# Altium PCB PCB1 VER 1.0 .PcbDoc
Units mm, origin at the board's own origin, x right, y up, seen from the top; angles counter-clockwise.
Board outline 352.04 x 230.5 mm, 4 copper layers (Top Layer, Internal Plane 1, Internal Plane 2, Bottom Layer); 40 components, 38 nets, 156 pads, 0 vias.
Unrouted connection lines stored in the file: 1.
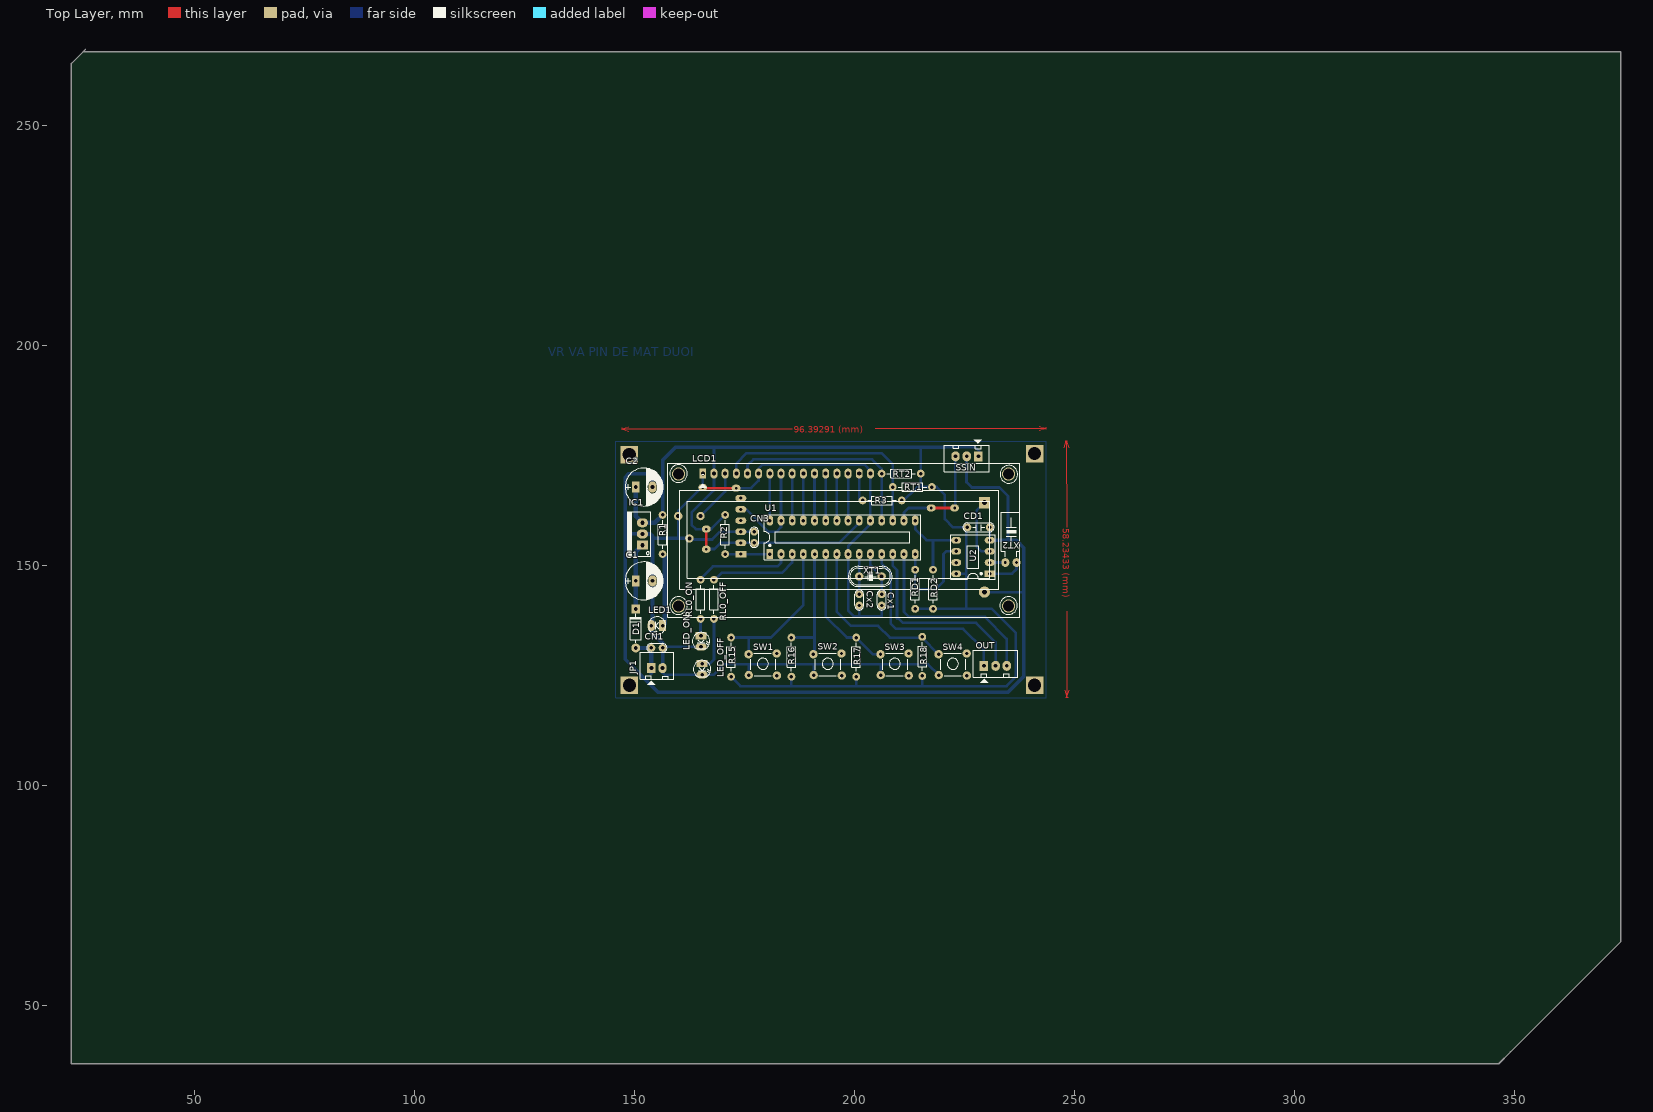
[diagram p0: Top Layer view]
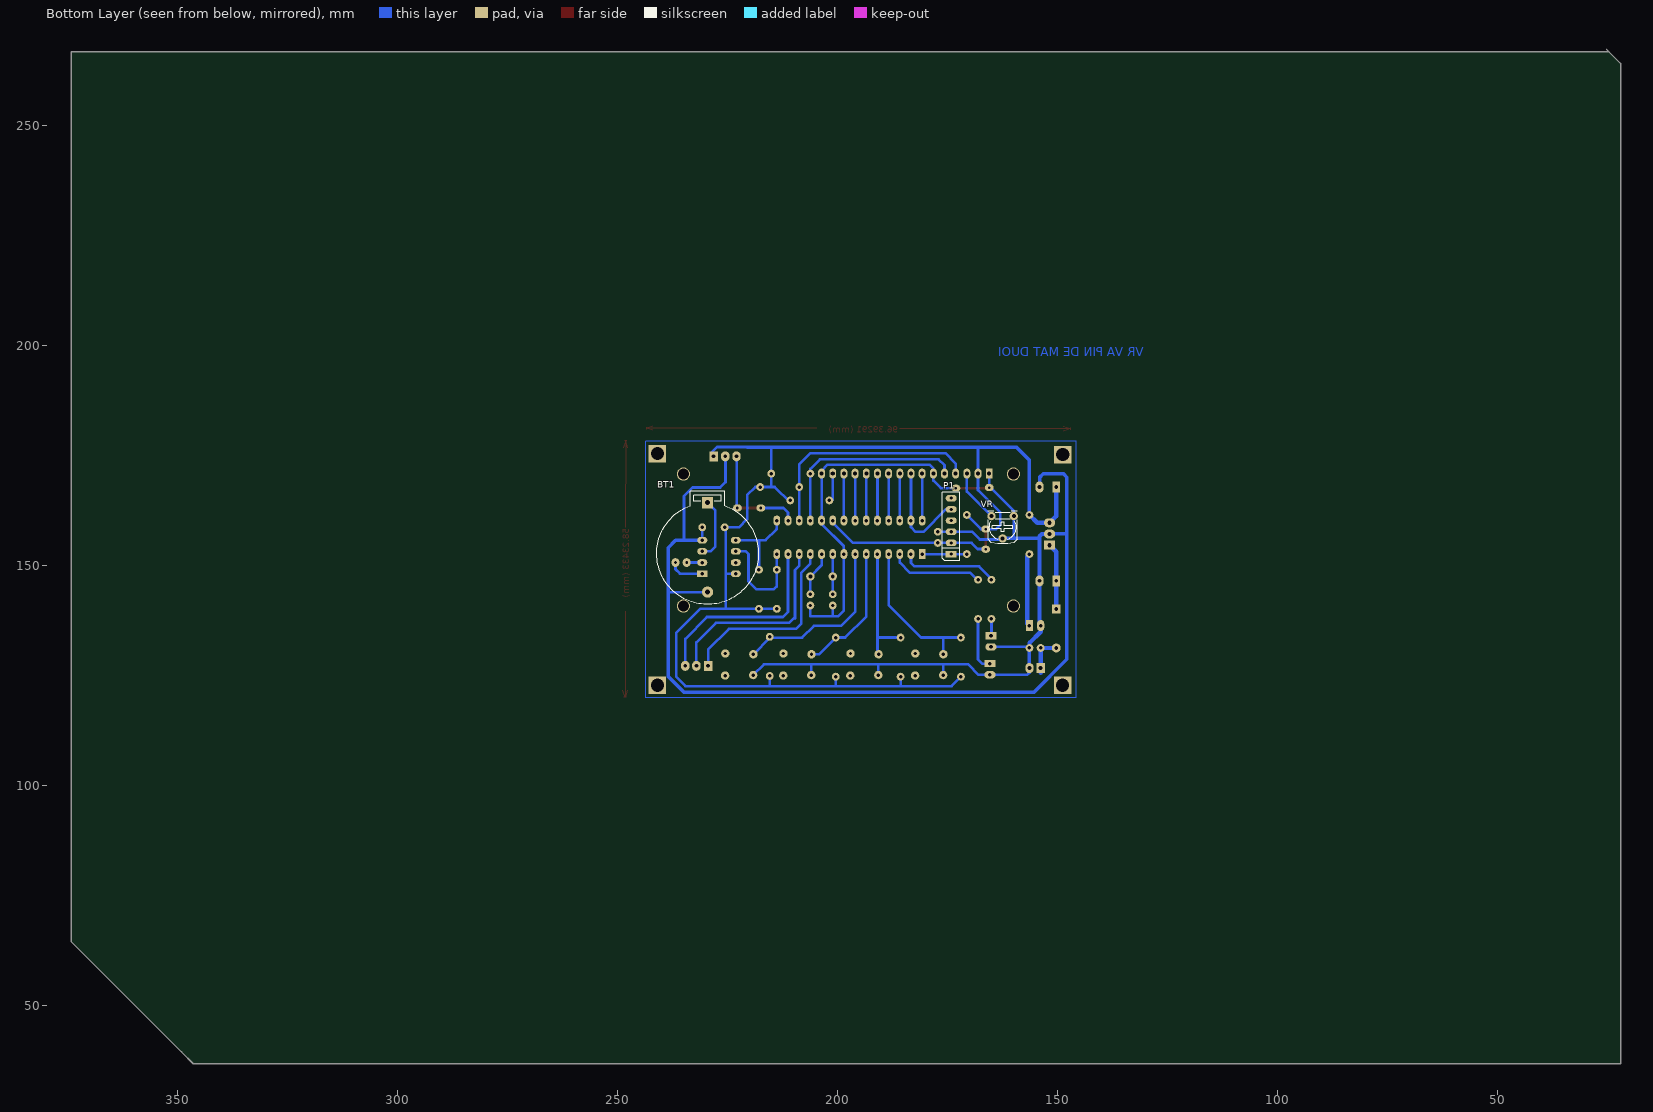
[diagram p1: Bottom Layer view, seen from below]
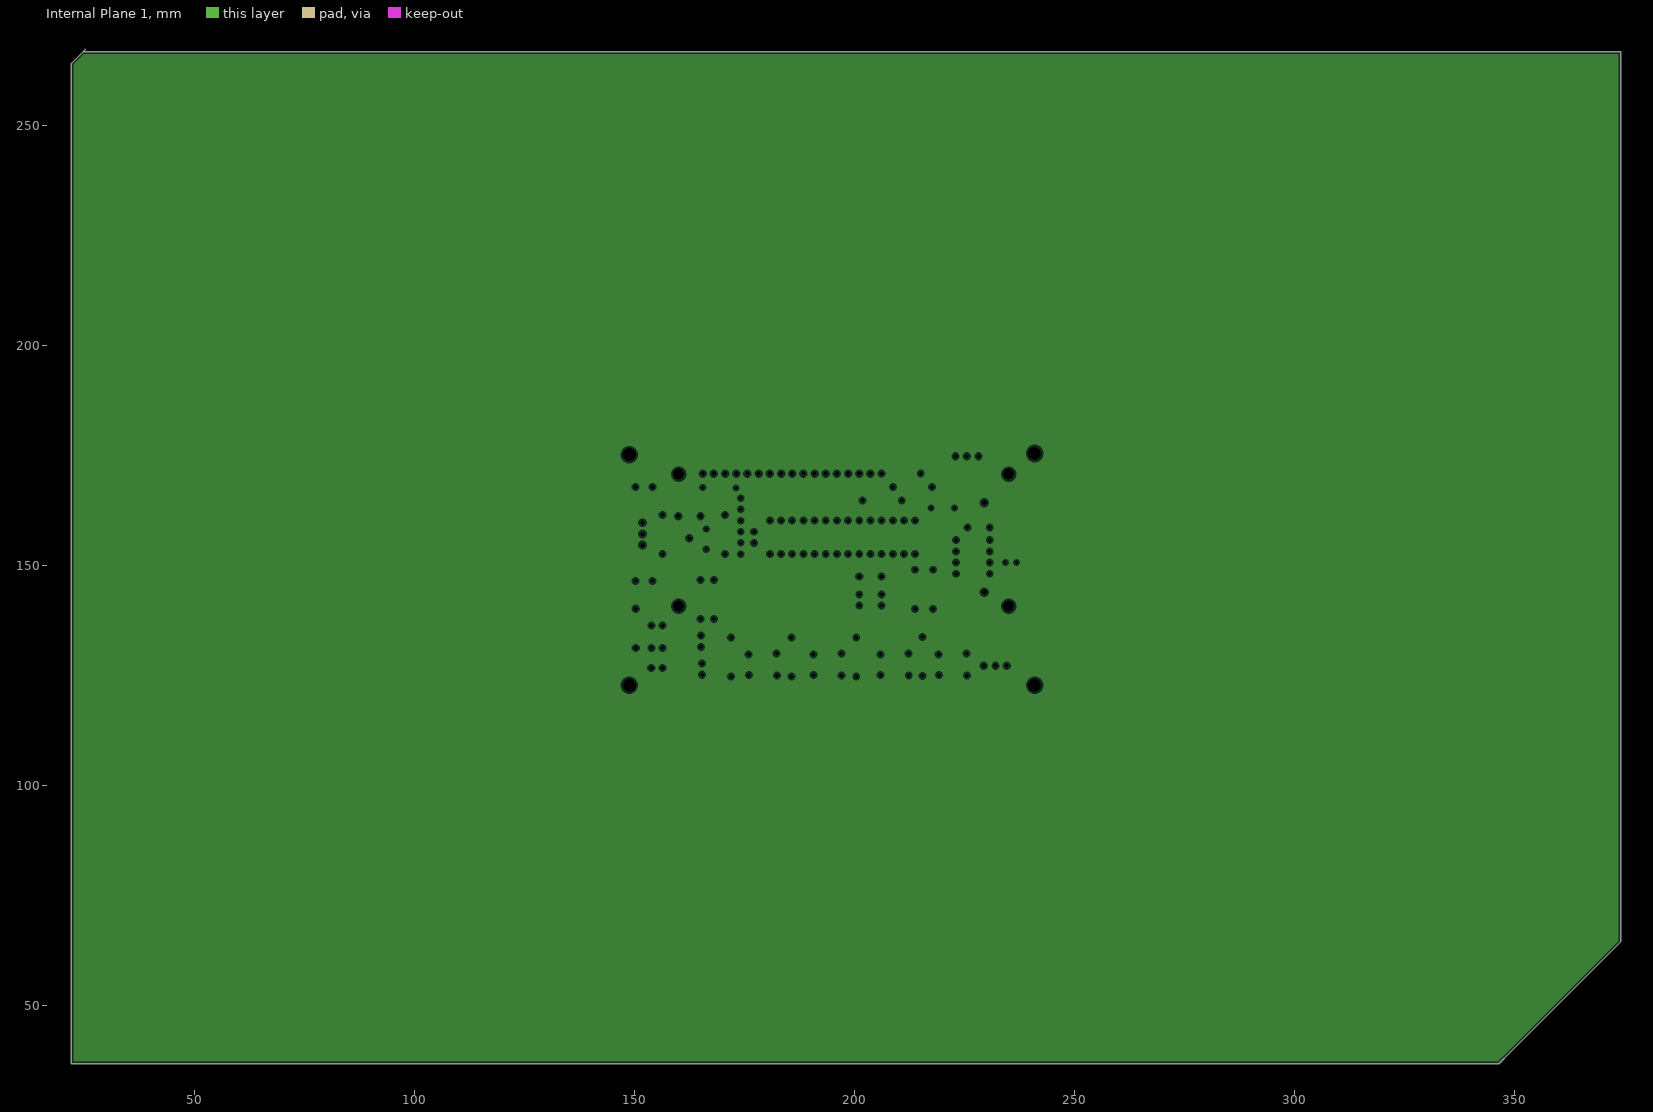
[diagram p2: Internal Plane 1, clearances drawn from the general rule]
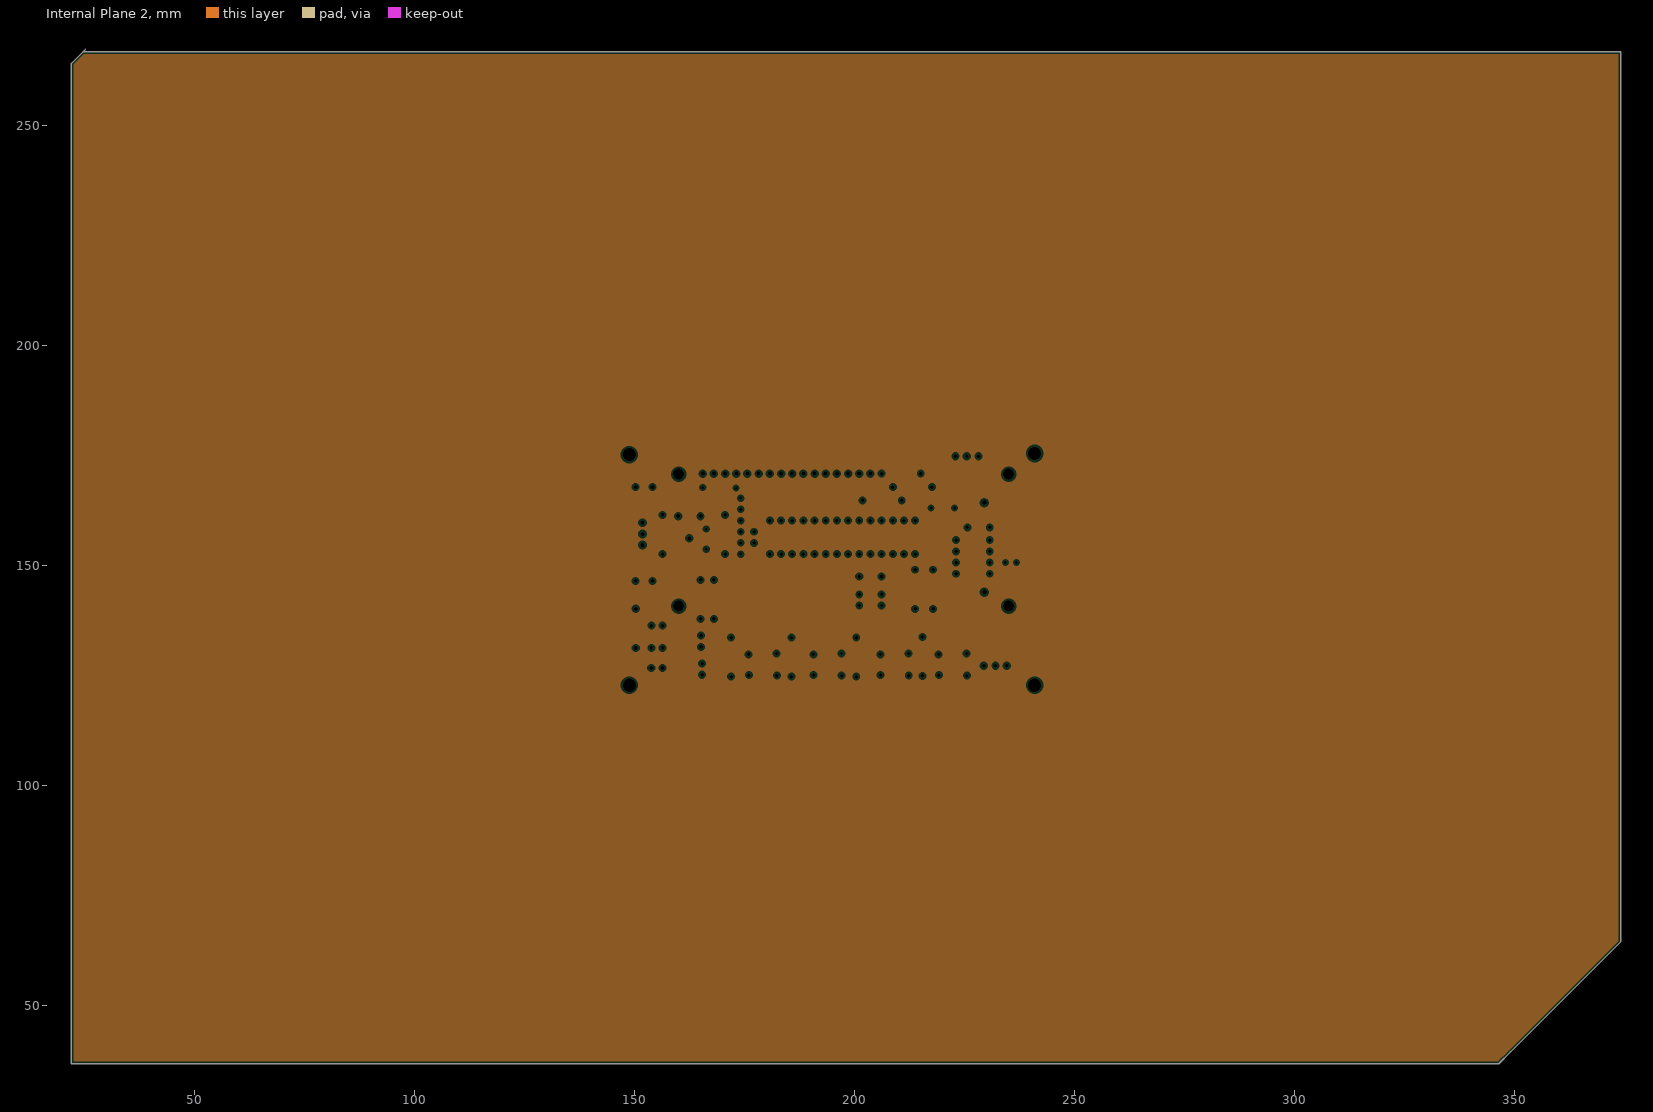
[diagram p3: Internal Plane 2, clearances drawn from the general rule]
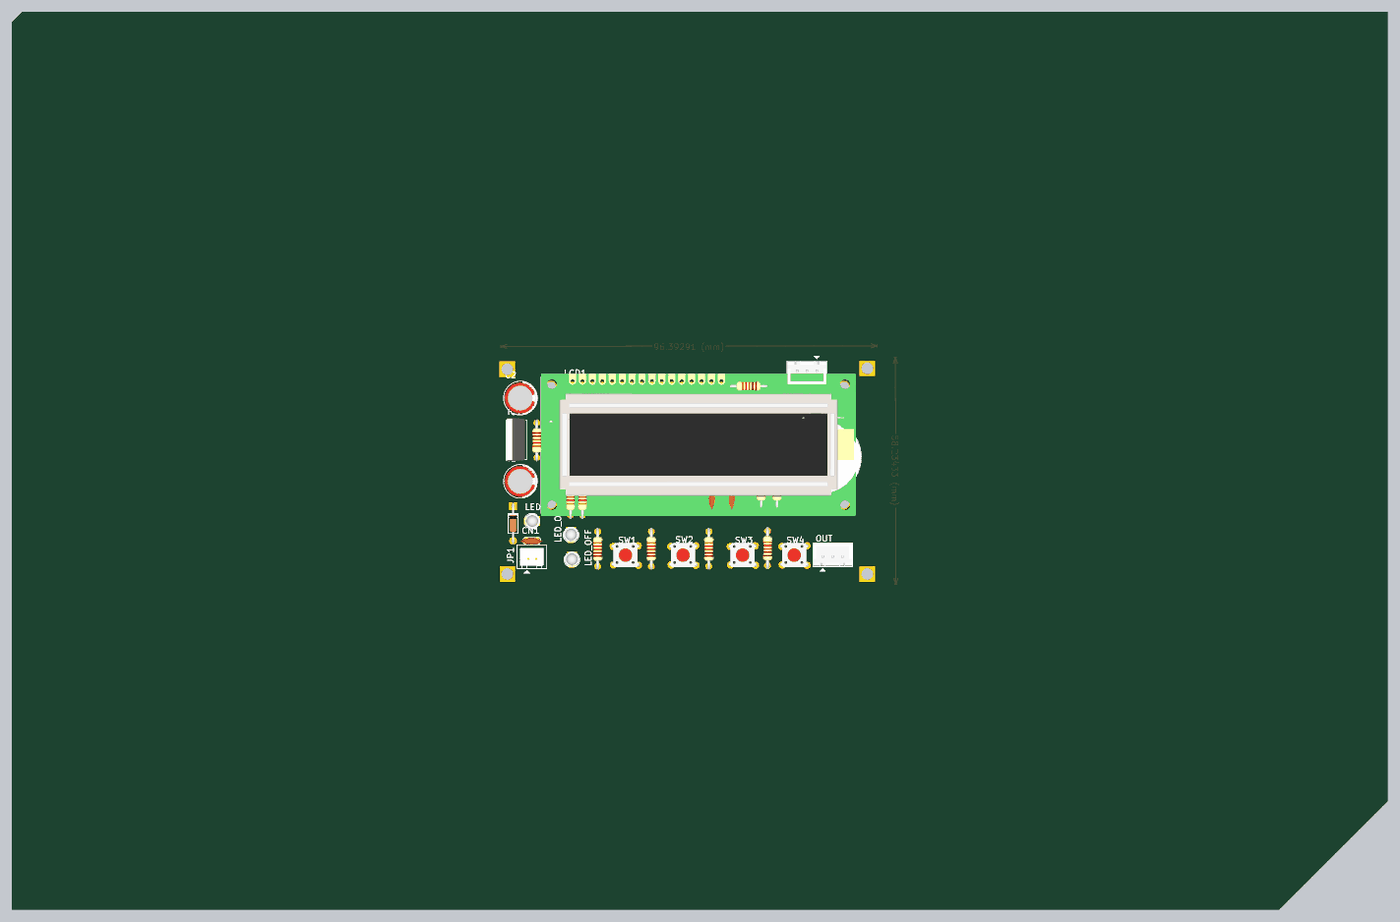
[diagram p4: 3D render of the assembled board from above, using the file's embedded part models]

## Layer stack, top to bottom
Top Layer: signal copper 0.0356
Dielectric: dielectric 0.32, FR-4, Dk 4.8
Internal Plane 1: plane copper 0.0356
Dielectric: dielectric 0.32, FR-4, Dk 4.8
Internal Plane 2: plane copper 0.0356
Dielectric: dielectric 0.32, FR-4, Dk 4.8
Bottom Layer: signal copper 0.0356

## Board outline
24.765,266.7 374.142,266.7 374.142,64.389 349.123,39.37 346.456,36.703 22.098,36.703 22.098,264.033 25.273,267.208

## Design rules (kind name [scope] priority, off if disabled: settings)
AssemblyTestPointUsage AssemblyTestPointUsage_1 [All] p2:
AssemblyTestpoint AssemblyTestpoint_1 [All] p2: testpointundercomponent=TRUE minsize=1.016 maxsize=2.54 preferedsize=1.524 minholesize=0 maxholesize=1.016 preferedholesize=0.813 testpointgrid=0.025 usegrid=TRUE gridtolerance=0 allowsidetop=TRUE allowsidebottom=TRUE
Clearance [All] p1: gap=0.2
ComponentClearance ComponentClearance_1 [All] p2: gap=0.254 collisioncheckmode=3 verticalgap=0.254 showdistances=FALSE
DiffPairsRouting DiffPairsRouting_1 [All] p2: maxlimit=0.254 minlimit=0.254 mostfreqgap=0.254 maxuncoupledlength=12.7
FabricationTestPointUsage TestPointUsage [All] p2: valid=0 allowmultiple=FALSE
FabricationTestpoint Testpoint [All] p2: side=3 testpointundercomponent=TRUE minsize=1.016 maxsize=2.54 preferedsize=1.524 minholesize=0 maxholesize=1.016 preferedholesize=0.813 testpointgrid=0.025 allowsidetop=TRUE allowsidebottom=TRUE usegrid=TRUE gridtolerance=0
FanoutControl Fanout_LCC [IsLCC] p1: bgadir=Out bgaviamode=Centered fanoutstyle=Auto fanoutdirection=Alternating viagrid=0.025 // Fanout_LCC (Default Rule)
FanoutControl Fanout_BGA [IsBGA] p2: bgadir=Out bgaviamode=Centered fanoutstyle=Auto fanoutdirection=Alternating viagrid=0.025 // Fanout_BGA (Default Rule)
FanoutControl Fanout_Small [(CompPinCount < 5)] p3: bgadir=Out bgaviamode=Centered fanoutstyle=Auto fanoutdirection=OutThenIn viagrid=0.025 // Fanout_Small (Default Rule)
FanoutControl Fanout_SOIC [IsSOIC] p4: bgadir=Out bgaviamode=Centered fanoutstyle=Auto fanoutdirection=Alternating viagrid=0.025 // Fanout_SOIC (Default Rule)
FanoutControl Fanout_BGA_1 [IsBGA] p6: bgadir=Out bgaviamode=Centered fanoutstyle=Auto fanoutdirection=Alternating viagrid=0.025 // Fanout_BGA (Default Rule)
FanoutControl Fanout_LCC_1 [IsLCC] p7: bgadir=Out bgaviamode=Centered fanoutstyle=Auto fanoutdirection=Alternating viagrid=0.025 // Fanout_LCC (Default Rule)
FanoutControl Fanout_SOIC_1 [IsSOIC] p8: bgadir=Out bgaviamode=Centered fanoutstyle=Auto fanoutdirection=Alternating viagrid=0.025 // Fanout_SOIC (Default Rule)
FanoutControl Fanout_Small_1 [(CompPinCount < 5)] p9: bgadir=Out bgaviamode=Centered fanoutstyle=Auto fanoutdirection=OutThenIn viagrid=0.025 // Fanout_Small (Default Rule)
FanoutControl Fanout_Default_1 [All] p10: bgadir=Out bgaviamode=Centered fanoutstyle=Auto fanoutdirection=Alternating viagrid=0.025 // Fanout_Default (Default Rule)
Height Height_1 [All] p2: minheight=0 maxheight=25.4 prefheight=12.7
HoleSize HoleSize_1 [All] p2: absolutevalues=TRUE maxlimit=2.54 minlimit=0.025 maxpercent=80.000 minpercent=20.000
HoleToHoleClearance HoleToHoleClearance_1 [All] p2: gap=0.254 allowstackedmicrovias=TRUE
LayerPairs LayerPairs_1 [All] p2: enforce=TRUE
MinimumSolderMaskSliver MinimumSolderMaskSliver_1 [All] p2: minsoldermaskwidth=0.254
NetAntennae NetAntennae_1 [All] p2: netantennaetolerance=0
PasteMaskExpansion PasteMaskExpansion_1 [All] p2: expansion=0
PlaneClearance [All] p1: clearance=0.508
PlaneClearance PlaneClearance_1 [All] p2: clearance=0.508
PlaneConnect [All] p1: planeconnectstyle=Relief reliefexpansion=0.508 reliefentries=4 reliefconductorwidth=0.254 reliefairgap=0.254
PolygonConnect [All] p1: connectstyle=Relief reliefconductorwidth=0.254 reliefentries=4 polygonreliefangle="90 Angle"
PolygonConnect PolygonConnect_1 [All] p2: connectstyle=Relief reliefconductorwidth=0.254 reliefentries=4 polygonreliefangle="90 Angle"
RoomDefinition dk_binh_nuoc_nong [InComponentClass('dk_binh_nuoc_nong')] p1: confinementstyle=ConfineIn formatcopy=TRUE lockcomponents=FALSE outline -5.08,-5.08 45.72,-5.08 45.72,20.32 -5.08,20.32
RoutingPriority RoutingPriority_1 [All] p2: routingpriority=0
RoutingTopology RoutingTopology_1 [All] p2: topology=Shortest
RoutingVias [All] p1: holewidth=0.6 width=1 viastyle="Through Hole" minholewidth=0.711 minwidth=1.27 maxholewidth=0.711 maxwidth=1.27
ShortCircuit ShortCircuit_1 [All] p2: allowed=FALSE
SilkToSilkClearance SilkToSilkClearance_1 [All] p2: silktosilkclearance=0.254
SilkscreenOverComponentPads [All] p1: minsilkscreentomaskgap=0.254
SilkscreenOverComponentPads SilkscreenOverComponentPads_1 [All] p2: minsilkscreentomaskgap=0.254
SolderMaskExpansion [All] p1: expansion=0.102
SolderMaskExpansion SolderMaskExpansion_1 [All] p2: expansion=0.102
UnRoutedNet UnRoutedNet_1 [All] p2:
Width [All] p1: maxlimit=1 minlimit=0.6 preferedwidth=0.6
21 further rules are at their usual default settings.

## Components (designator, comment, footprint, x,y, rotation, side; value= is the part's Value field where it differs from the comment)
BT1 "PIN 3V" PIN3V 229.58,164.213 r270 bottom
C1 "1000uF/16V" CP1.5/3.4 150.332,146.433 r0 top
C2 "100uF/35V" CP1.5/3.4 150.332,167.769 r0 top
CD1 "104" CN2 230.783,158.605 r180 top
CN1 "104" CN1 156.428,131.193 r180 top
CN3 "104" CN1 177.256,157.609 r270 top
Cx1 "22pF" CN1 206.212,143.385 r270 top
Cx2 "22pF" CN1 201.132,143.385 r270 top
D1 "1N4007" D1A 150.332,131.193 r270 top
IC1 "78xx" QTO-220 151.856,154.561 r90 top
JP1 "JP2" CON2 153.888,126.621 r0 top
LCD1 "LCD16x2A" LCD16X2 165.572,170.817 r0 top
LED1 "LED" LED-3 156.428,136.273 r180 top
LED_OFF "LED" LED-3 165.405,127.642 r270 top
LED_ON "LED" LED-3 165.175,133.976 r270 top
OUT "JP3" CON3 229.58,127.129 r0 top
P1 "Header 6" HED6 174.208,152.529 r90 bottom
R1 "1k" R1/4W 156.428,152.529 r90 top
R2 "10k" R1/4W 170.652,152.529 r90 top
R3 "220" R1/4W 210.784,164.721 r180 top
R15 "10k" R1/4W 171.999,133.566 r270 top
R16 "10k" R1/4W 185.715,133.566 r270 top
R17 "10k" R1/4W 200.447,133.566 r270 top
R18 "10k" R1/4W 215.467,133.722 r270 top
RD1 "4K7" R1/4W 213.832,148.973 r270 top
RD2 "4k7" R1/4W 217.896,148.973 r270 top
RL0_OFF "1k" R1/4W 168.112,137.797 r90 top
RL0_ON "1k" R1/4W 165.064,137.797 r90 top
RT1 "10K" R1/4W 208.752,167.769 r0 top
RT2 "10K" R1/4W 206.212,170.817 r0 top
SSIN "JP3" CON3 228.092,174.752 r180 top
SW1 "SW" SW4 176.063,130.01 r0 top
SW2 "SW" SW4 190.795,130.01 r0 top
SW3 "SW" SW4 206.035,130.01 r0 top
SW4 "SW" SW4 219.243,130.01 r0 top
U1 "PIC16F886-I/SP" DIP28/W0.3 180.812,152.529 r0 top
U2 "DS1307" DIP8/W0.3 230.783,148.064 r90 top
VR "10K" VR 159.984,161.165 r0 bottom
XT1 "12MHz" XT2 203.672,147.449 r0 top
XT2 "32.768kHz" XT32k 234.339,150.604 r90 top

## Footprints (in the part's own frame and the unit in brackets; to place one, negate y for a bottom-side part, rotate by r counter-clockwise, add the part's x,y. Pads: shape width x height; smd on the part's side, far side on the other; paste and mask are expansions set on the pad)
CN1 [mil]
  round 70 hole 31: 1(0,0) 2(100,0)
  silkscreen extent -40,-40 141,40, body extent -60,-30 170,37, height 265
CN2 [mil]
  round 70 hole 31: 1(0,0) 2(200,0)
  silkscreen extent -40,-40 240,40
CON2 [mil] "CON2"
  rect 75x90 hole 34: 1(0,0)
  oval 75x90 hole 34: 2(100,0)
  silkscreen extent -100,-150 200,140, body extent -68,-70 168,107, height 236
CON3 [mil] "CON 3"
  rect 75x90 hole 34: 1(-5,0)
  oval 75x90 hole 34: 2(100,0) 3(200,0)
  silkscreen extent -100,-150 300,140, body extent -95,-90 295,136, height 276
CP1.5/3.4 [mil] "Tu hoa 220->470uF,16V, 470uF/16V,25V"
  rect 70x100 hole 32: 1(0,0)
  oval 70x100 hole 32: 2(150,0)
  silkscreen extent -95,-170 245,170, body extent -85,-157 230,157, height 446
D1A [mil] "Diode 1A, W 100mil, L 350mil"
  round 80 hole 35: 1(0,0)
  rect 80x80 hole 35: 2(-350,0)
  silkscreen extent -305,-50 -45,50, body extent -386,-33 34,36, height 84
DIP8/W0.3 [mil] "8 PIN, W 300mil, Pin to pin 100mil"
  rect 60x90 hole 31: 1(0,0)
  oval 60x90 hole 31: 2(100,0) 3(200,0) 4(300,0) 5(300,300) 6(200,300) 7(100,300) 8(0,300)
  silkscreen extent -50,-50 350,350, body extent -50,-40 350,336, height 201
DIP28/W0.3 [mil] "28 PIN, W 300mil, Pin to pin 100mil"
  rect 60x90 hole 31: 1(0,0)
  oval 60x90 hole 31: 2(100,0) 3(200,0) 4(300,0) 5(400,0) 6(500,0) 7(600,0) 8(700,0) 9(800,0) 10(900,0) 11(1000,0) 12(1100,0) 13(1200,0) 14(1300,0) 15(1300,300) 16(1200,300) 17(1100,300) 18(1000,300) 19(900,300) 20(800,300) 21(700,300) 22(600,300) 23(500,300) 24(400,300) 25(300,300) 26(200,300) 27(100,300) 28(0,300)
  silkscreen extent -50,-50 1350,350, body extent -50,-10 1367,300, height 200
HED6 [mm] "HED6"
  rect 1.5x2.5 hole 0.7: 1(0,0)
  oval 1.5x2.5 hole 0.7: 2(2.54,0) 3(5.08,0) 4(7.62,0) 5(10.16,0) 6(12.7,0)
  silkscreen extent -1.5,-1.9 14,2
LCD16X2 [mil] "LCD dipslay 16x2, 16 pin"
  rect 62x90 hole 36: 1(0,0)
  oval 62x90 hole 36: 2(100,0) 3(200,0) 4(300,0) 5(400,0) 6(500,0) 7(600,0) 8(700,0) 9(800,0) 10(900,0) 11(1000,0) 12(1100,0) 13(1200,0) 14(1300,0) 15(1400,0) 16(1500,0)
  round 118.11 hole 98.43: 29(-216.54,-3.94) 30(-216.54,-1185.04) 31(2736.22,-3.94) 32(2736.22,-1185.04)
  silkscreen extent -315,-1283 2835,94, body extent -315,-1309 2854,128, height 414
LED-3 [mil] "LED 2 PIN, 3ly Only colour"
  rect 65x100 hole 32: 1(0,0)
  oval 65x100 hole 32: 2(100,0)
  silkscreen extent -29,-78 118,79, body extent -29,-75 109,75, height 256
PIN3V [mil] "Socket PIN 3V"
  rect 100x100 hole 45: 1(0,0)
  round 100 hole 45: 2(800,0)
  silkscreen extent -100,-455 910,455, body extent 53,-394 850,394, height 10
QTO-220 [mil] "TO-220 - 1-2-3"
  rect 80x100 hole 39: 1(0,0)
  oval 80x100 hole 39: 2(100,0) 3(200,0)
  silkscreen extent -100,-76 300,130, body extent -119,-64 322,121, height 905
R1/4W [mil] "R 1/4W, 2 Pin, 350mil"
  round 70 hole 31: 1(0,0) 2(350,0)
  silkscreen extent 48,-38 302,38, body extent -40,-47 386,47, height 111
SW4 [mil] "SW button 4pin, 250 x250 mil"
  round 75 hole 31: 1(-3,-10) 2(250,-200) 3(248,-3) 4(-1,-196)
  silkscreen extent 15,-215 240,0, body extent -36,-220 276,24, height 276
VR [mil] "Resistor Variable"
  round 75 hole 35: 1(0,0) 2(100,200) 3(200,0)
  silkscreen extent -31,-44 231,246, body extent -87,-30 307,372, height 165
XT2 [mil] "Footpin for Crystal 2 pin"
  round 75 hole 34: 1(-100,0) 2(100,0)
  silkscreen extent -198,-90 195,90, body extent -233,-93 213,90, height 138
XT32k [mm] "Crystal 32k, 2 pin, real timer for DS1307"
  oval 2x1.8 hole 0.6: 1(0,0) 2(0,-2.54)
  silkscreen extent 1.27,-3.3 11.4,0.91

## Part data
BT1: "Battery 3VDC"
C1: library part CP4, "Cap 1000uF/16V - 220uF/50V"
C2: library part CP3, "Cap 100uF/35V - 470uF/16V"
CD1 CN1 CN3: library part CN2, "Cap np 104 => 105pF"
Cx1 Cx2: library part CN0, "Cremic For Xtal 1pF => 100pF"
D1: library part D1A, "Diode 1A"
JP1: library part Con2, "Connector 2"
LCD1: library part LCD16x2, "LCD dipslay 16 char, 2 line"
LED1 LED_OFF LED_ON: "LED Single colour Green and Red"
OUT SSIN: library part Con3, "Connector 3"
P1: "Header, 6-Pin"
R1 R2 R3 R15 R16 R17 R18 RD1 RD2 RL0_OFF RL0_ON RT1 RT2: library part R1/4W, "Resistor 1/4W"
SW1 SW2 SW3 SW4: library part SW4, "Switch button 4 pin"
U1: "Flash-Based, 8-Bit CMOS Microcontroller with nanoWatt Technology, 8K (x14-Bit words) Program Memory, 624 Bytes Data Memory, 24 I/O pins, 28-Pin SPDIP, Standard VDD Range, Industrial Temperature"
U2: "64 X 8 Serial Real-Time Clock"
VR: library part VR, "Var Resistor"
XT1 XT2: library part XTAL, "Crystal Oscillator"

## Free pads (board coordinates)
  oval 2x1.6 hole 0.6: 2(165.572,167.642) 3(173.138,167.509) 4(222.794,163.013) 5(217.471,163.013) 10(166.369,153.626) 11(166.369,158.208)
  rect 4x4 hole 3: 6(148.854,175.139) 7(148.891,122.707) 8(240.992,122.707) 9(240.992,175.371)

## Nets (pads, with @x,y where several pads share a name; then routed paths per layer and width w, separated by ;. In a path a pad name is that pad's centre, name@x,y a point inside that pad or via, vN(x,y) a via of type N, cw(c..) or ccw(c..) an arc to the next point about the centre after c; other vN are vias at no path point)
D0: LCD1.7 P1.4 U1.28 | length 10.2
  Bottom Layer w0.6: U1.28 LCD1.7@180.812,170.309
D1: LCD1.8 P1.5 U1.27 | length 23.4
  Bottom Layer w0.6: P1.5 175.456,162.689 180.555,157.59 182.293,157.59 183.352,158.649 U1.27 LCD1.8@183.352,170.309
D2: LCD1.9 U1.26 | length 10.2
  Bottom Layer w0.6: U1.26 LCD1.9@185.892,170.309
D3: LCD1.10 U1.25 | length 10.2
  Bottom Layer w0.6: U1.25 LCD1.10@188.432,170.309
D4: LCD1.11 U1.24 | length 10.2
  Bottom Layer w0.6: U1.24 LCD1.11@190.972,170.309
D5: LCD1.12 U1.23 | length 10.2
  Bottom Layer w0.6: U1.23 LCD1.12@193.512,170.309
D6: LCD1.13 U1.22 | length 10.2
  Bottom Layer w0.6: U1.22 LCD1.13@196.052,170.309
D7: LCD1.14 U1.21 | length 10.2
  Bottom Layer w0.6: U1.21 LCD1.14@198.592,170.309
DOWN: R17.1 SW3.1 U1.6 | length 29.2
  Bottom Layer w0.6: U1.6 193.512,138.374 198.32,133.566 R17.1 204.257,129.756 204.943,129.756
GND: BT1.2 C1.2 C2.2 CD1.1 CN1.1 CN3.1 Cx1.2 Cx2.2 IC1.2 JP1.2 LCD1.1 LCD1.6 LCD1.16 LED1.2 LED_OFF.2 LED_ON.2 P1.3 pad.2 pad.3 SSIN.2 SW1.4 SW2.4 SW3.4 SW4.4 U1.8 U1.19 U2.4 VR.1 VR.2 | length 471.5
  Top Layer w0.6: pad.2 165.705,167.509 pad.3
  Bottom Layer w0.6: JP1.2@156.428,125.605 156.931,125.102 LED_OFF.2 167.953,125.102 170.335,127.484 216.765,127.484 SW4.4 ; CN1.1@156.671,131.436 LED_ON.2 ; 159.984,156.046 159.984,156.155 VR.1 159.984,162.301 165.325,167.642 pad.2 LCD1.1 ; VR.2@162.801,155.854 167.702,155.854 169.457,157.609 P1.3 CN3.1 ; pad.3 176.569,167.509 178.272,169.212 LCD1.6 ; SW1.4@175.757,124.92 SW1.4@176.041,124.636 ; SW1.4 176.038,127.416 ; LCD1.6@178.272,170.309 LCD1.6 ; SW2.4 190.77,127.345 ; 201.132,138.422 Cx2.2 ; SW3.4 206.01,127.458 ; Cx1.2 206.212,138.366 199.923,138.366 198.592,139.697 U1.8 198.592,154.307 203.672,159.387 U1.19 203.672,171.452 202.275,172.849 179.161,172.849 178.272,171.96 LCD1.6 ; SSIN.2@225.516,174.702 225.516,168.869 226.734,167.651 233.012,167.651 234.927,165.736 234.927,155.684 ; BT1.2 238.5,143.893 ; U2.4 CD1.1
  Bottom Layer w0.8: 147.911,157.101 IC1.2 ; 154.142,156.155 159.984,156.155 VR.2@162.5,156.155 ; C2.2 154.142,169.94 153.326,170.756 148.689,170.756 147.911,169.978 147.911,128.64 155.37,121.181 235.015,121.181 238.543,124.709 238.543,154.004 236.863,155.684 U2.4 ; JP1.2@156.428,125.605 CN1.1
  Bottom Layer w1: IC1.2 153.594,157.101 154.142,156.553 154.142,156.155 ; LED1.2 153.888,134.878 156.428,132.338 CN1.1 ; LED1.2@154.142,136.527 C1.2 154.142,155.854
MCLR: P1.1 R2.1 U1.1 | length 10.7
  Bottom Layer w0.6: R2.1@170.144,152.529 P1.1 U1.1
MENU: R15.1 SW1.1 U1.4 | length 34.9
  Bottom Layer w0.6: R15.1 181.082,133.566 188.432,140.916 U1.4 ; SW1.1 175.987,133.561
NetBT1_1: BT1.1 U2.3 | length 14.1
  Bottom Layer w0.6: BT1.1 227.833,162.466 227.833,154.199 228.888,153.144 U2.3
NetC1_1: C1.1 D1.2 IC1.1 | length 15.1
  Bottom Layer w1: D1.2 C1.1 150.332,153.037 IC1.1
NetCN1_2: CN1.2 D1.1 JP1.1 | length 9.1
  Bottom Layer w1: D1.1 CN1.2 JP1.1@153.888,125.605
NetCx1_1: Cx1.1 U1.10 XT1.2 | length 10.2
  Bottom Layer w0.6: U1.10 203.672,149.989 XT1.2 Cx1.1
NetCx2_1: Cx2.1 U1.9 XT1.1 | length 9.1
  Bottom Layer w0.6: Cx2.1 XT1.1 U1.9
NetLCD1_3: LCD1.3 VR.3 | length 12
  Bottom Layer w0.6: VR.3 170.652,166.753 LCD1.3
NetLCD1_15: LCD1.15 R3.2 | length 6.9
  Bottom Layer w0.6: LCD1.15 201.132,164.975 R3.2@201.894,164.213
NetLED1_1: LED1.1 R1.1 | length 16.7
  Bottom Layer w1: LED1.1 156.91,136.755 156.91,152.047 R1.1
NetLED_OFF_1: LED_OFF.1 RL0_OFF.1 | length 12.3
  Bottom Layer w0.6: LED_OFF.1 167.186,127.642 168.112,128.568 RL0_OFF.1
NetLED_ON_1: LED_ON.1 RL0_ON.1 | length 3.7
  Bottom Layer w0.6: LED_ON.1@165.064,134.087 RL0_ON.1
NetRL0_OFF_2: RL0_OFF.2 U1.3 | length 21.5
  Bottom Layer w0.6: RL0_OFF.2@168.032,146.452 169.895,148.315 183.639,148.315 185.892,150.568 U1.3
NetRL0_ON_2: RL0_ON.2 U1.2 | length 22
  Bottom Layer w0.6: RL0_ON.2 165.064,146.898 167.893,149.727 182.524,149.727 183.352,150.555 U1.2
NetU2_1: U2.1 XT2.2 | length 8
  Bottom Layer w0.6: U2.1 235.863,148.064 236.879,149.08 XT2.2
NetU2_2: U2.2 XT2.1 | length 3.6
  Bottom Layer w0.6: U2.2 XT2.1
OUT1: OUT.1 U1.11 | length 43.9
  Bottom Layer w0.6: U1.11 206.212,150.337 208.26,148.289 208.26,136.804 209.528,135.536 224.752,135.536 229.453,130.835 OUT.1
OUT2: OUT.2 U1.12 | length 45.2
  Bottom Layer w0.6: U1.12 208.752,149.864 209.715,148.901 209.715,138.217 ; 209.715,137.878 209.715,138.217 ; 227.709,136.862 232.12,132.451 OUT.2 ; 227.709,136.892 211.04,136.892 209.715,138.217
OUT3: OUT.3 U1.13 | length 45.4
  Bottom Layer w0.6: U1.13 211.292,139.41 212.485,138.217 229.727,138.217 ; 229.687,138.217 234.647,133.257 OUT.3@234.647,126.887
RS: LCD1.4 RT1.1 U1.17 | length 52.6
  Bottom Layer w0.6: LCD1.4 173.192,173.098 175.551,175.457 206.18,175.457 208.752,172.885 U1.17
RW: LCD1.5 RT2.1 U1.18 | length 46.1
  Bottom Layer w0.6: LCD1.5@175.732,170.309 175.732,172.722 177.084,174.074 204.049,174.074 206.212,171.911 U1.18
SCL: RD1.1 U1.14 U2.6 | length 24.2
  Bottom Layer w0.6: 213.832,145.114 213.832,145.257 ; U1.14 RD1.1 213.832,145.257 ; U2.6 220.879,153.144 220.286,152.551 220.286,146.312 218.541,144.567 214.522,144.567 213.832,145.257
SDA: RD2.1 U1.15 U2.5 | length 18.8
  Bottom Layer w0.6: 213.832,158.241 U1.15 ; 213.967,158.103 216.386,155.684 U2.5 ; RD2.1 217.896,155.684
SET: R18.1 SW4.1 U1.7 | length 40.2
  Bottom Layer w0.6: U1.7 196.052,139.392 199.237,136.207 205.397,136.207 208.069,133.535 215.388,133.535 SW4.1
SQW_OUT: U2.7
SSI: pad.4 pad.5 SSIN.3 U1.16 | length 24.9
  Top Layer w0.6: pad.5 pad.4
  Bottom Layer w0.6: U1.16 211.292,161.95 212.355,163.013 pad.5@217.125,163.013 ; pad.4@222.976,163.151 SSIN.3@222.976,174.619
UP: R16.1 SW2.1 U1.5 | length 28
  Bottom Layer w0.6: R16.1 190.898,133.566 ; SW2.1@190.972,129.756 U1.5
VCC: C2.1 CD1.2 CN3.2 IC1.3 LCD1.2 P1.2 pad.10 pad.11 R1.2 R2.2 R3.1 R15.2 R16.2 R17.2 R18.2 RD1.2 RD2.2 RT1.2 RT2.2 SSIN.1 U1.20 U2.8 | length 333.3
  Top Layer w0.6: pad.10 pad.11
  Bottom Layer w0.6: pad.10@166.232,153.695 168.229,153.695 169.603,155.069 P1.2 CN3.2 196.56,155.069 U1.20@201.386,159.895 ; 168.112,176.851 LCD1.2 168.112,167.069 163.062,162.019 163.062,159.188 164.042,158.208 pad.11 167.441,158.208 R2.2 ; R15.2 174.148,122.527 234.612,122.527 236.695,124.61 236.695,134.652 231.264,140.083 RD2.2 RD1.2 ; 185.715,122.629 R16.2 ; 200.447,122.762 R17.2 ; R3.1@210.784,164.213 214.34,167.769 215.102,167.769 ; 215.102,176.821 RT2.2 215.102,167.769 ; 215.467,122.639 R18.2 ; 220.569,176.851 227.396,176.851 228.545,175.702 SSIN.1@228.545,174.369 ; U2.8 225.062,148.064 ; 225.443,140.145 225.443,158.588 222.453,158.588 220.569,160.472 220.569,165.919 218.719,167.769 215.102,167.769
  Bottom Layer w0.8: R1.2 156.428,173.878 159.401,176.851 168.112,176.851 220.569,176.851
  Bottom Layer w1: C2.1 150.332,161.165 IC1.3 154.65,159.641 R1.2
pads on no net: LCD1.29 LCD1.30 LCD1.31 LCD1.32 P1.6 SW1.2 SW1.3 SW2.2 SW2.3 SW3.2 SW3.3 SW4.2 SW4.3
copper on no net: | length 443.9
  Top Layer w0.254: 147.172,180.736 147.171,181.244 ; 148.694,181.5 147.171,180.99 ; 148.696,180.484 147.171,180.99 ; 185.947,181.045 147.171,180.99 ; 204.788,181.072 243.564,181.128 ; 242.039,181.634 243.564,181.128 ; 242.041,180.618 243.564,181.128 ; 243.564,181.382 243.564,180.874 ; 247.694,176.722 248.199,178.247 ; 247.829,121.536 248.341,120.013 ; 247.945,178.247 248.453,178.248 ; 248.087,120.012 248.595,120.014 ; 248.246,158.677 248.199,178.247 ; 248.293,139.583 248.341,120.013 ; 248.71,176.724 248.199,178.247 ; 248.845,121.538 248.341,120.013
  Bottom Layer w0.2: 145.829,119.89 243.686,119.89 243.686,178.188 145.829,178.188 145.829,119.89

## Polygon pours and split planes (outlines as drawn)
no net on Internal Plane 1 (split plane): 373.632,64.6 348.762,39.731 346.245,37.213 22.608,37.213 22.608,263.822 24.976,266.19 373.632,266.19
no net on Internal Plane 2 (split plane): 373.632,64.6 348.762,39.731 346.245,37.213 22.608,37.213 22.608,263.822 24.976,266.19 373.632,266.19

## Other copper
Top Layer:
  text "96.39291 (mm)" at 186.202,180.132 h1.52 r0.08
  text "58.23433 (mm)" at 247.333,158.421 h1.52 r270.14
Bottom Layer:
  text "VR VA PIN DE MAT DUOI" at 130.398,197.54 h2

## Silkscreen, mask and mechanical layers (free items; w line width, h text height)
Mechanical 16:
  drawing of 1882 lines, arcs and shapes, not listed
  text "1" at 24.037,278.511 h1.78
  text "2" at 73.076,278.511 h1.78
  text "3" at 122.335,278.511 h1.78
  text "4" at 171.628,278.511 h1.78
  text "5" at 220.904,278.511 h1.78
  text "6" at 269.926,278.511 h1.78
  text "7" at 319.456,278.511 h1.78
  text "8" at 368.478,278.511 h1.78
  text "A" at 1.905,244.526 h1.78
  text "A" at 390.525,244.526 h1.78
  text "B" at 1.905,173.914 h1.78
  text "B" at 390.525,173.914 h1.78
  text "C" at 1.905,103.302 h1.78
  text "C" at 390.525,103.302 h1.78
  text "D" at 1.905,33.198 h1.78
  text "D" at 390.525,33.198 h1.78
  text "ENGINEER:" at 275.59,33.02 h1.14
  text "TITLE:" at 313.69,33.02 h1.14
  text "PCB DESIGNER:" at 275.59,25.527 h1.14
  text "DATE:" at 275.59,17.78 h1.14
  text "PART NO.:" at 313.69,17.78 h1.14
  text "REV:" at 367.03,17.78 h1.14
  text "Altium Limited" at 242.57,15.24 h1.78
  text ".PRINT_DATE" at 276.86,14.732 h1.78
  text "12a Rodborough Rd" at 242.57,12.7 h1.78
  text "Frenchs Forest" at 242.57,10.16 h1.78
  text "FILE NAME:" at 275.59,10.16 h1.14
  text "DWG NO:" at 313.69,10.16 h1.14
  text "SCALE:" at 367.03,10.16 h1.14
  text "NSW 2086" at 242.57,7.62 h1.78
  text ".PCB_FILE_NAME_NO_PATH" at 276.86,7.112 h1.78
  text "1" at 24.037,1.651 h1.78
  text "2" at 73.076,1.651 h1.78
  text "3" at 122.335,1.651 h1.78
  text "4" at 171.628,1.651 h1.78
  text "5" at 220.904,1.651 h1.78
  text "6" at 269.926,1.651 h1.78
  text "7" at 319.456,1.651 h1.78
  text "8" at 368.478,1.651 h1.78